# EAGLE board bi-directional_modfet_level_shifter (EAGLE 9.6.2)

Size 100 x 80 mm. Coordinates in mm from the lower left corner, seen from the top.
Outline: 0,0 100,0 100,80 0,80 0,0
Copper layers (1*16): Top 0.035mm / dielectric 1.5mm / Bottom 0.035mm
Design rules "default": minimum track width 6mil, minimum drill 0.35mm, track to track 6mil, track to pad 6mil, pad to pad 6mil, via to via 6mil, smd to smd 6mil, copper to edge 40mil, drill to drill 6mil, minimum pad ring 10mil, minimum via ring 8mil, stop-mask expansion 4mil, vias tented up to drill 0mil, thermal gap 10mil

## Footprints (pad centres in the part's own frame; a part is rotated, then mirrored left to right if it is on the bottom)
TO-92 = drill 0.813 octagon: 1 -1.27,0; 2 0,1.905; 3 1.27,0
AXIAL-0.3-KIT = drill 1.016 pad 2.032: P$1 -3.81,0; P$2 3.81,0

## Placement (x,y rotation side)
2N7000_TO92  [TO-92]  -19.05,-3.81 0 top  (outside the outline)
R1  10k  [AXIAL-0.3-KIT]  -17.78,10.16 0 top  (outside the outline)
R2  10k  [AXIAL-0.3-KIT]  -17.78,15.24 0 top  (outside the outline)

## Library data of the parts
2N7000_TO92 = transistors
R1 R2 = SparkFun-Resistors; PROD_ID: RES-12183

## Nets
+3V3: 2N7000_TO92.2 R1.P$2
+12V: R2.P$2
HIGH_I/0: 2N7000_TO92.3 R2.P$1
LOW_I/O: 2N7000_TO92.1 R1.P$1

## Tracks (layer width: path | path; a pad name or v marks a point on that pad's centre or on a via)
+3V3  (1 unrouted)
HIGH_I/0  (1 unrouted)
LOW_I/O  (1 unrouted)